# Altium PCB Temp.PcbDoc
Units mm, origin at the board's own origin, x right, y up, seen from the top; angles counter-clockwise.
Board outline 30 x 40 mm, 2 copper layers (Top Layer, Bottom Layer); 5 components, 0 nets, 215 pads, 0 vias.
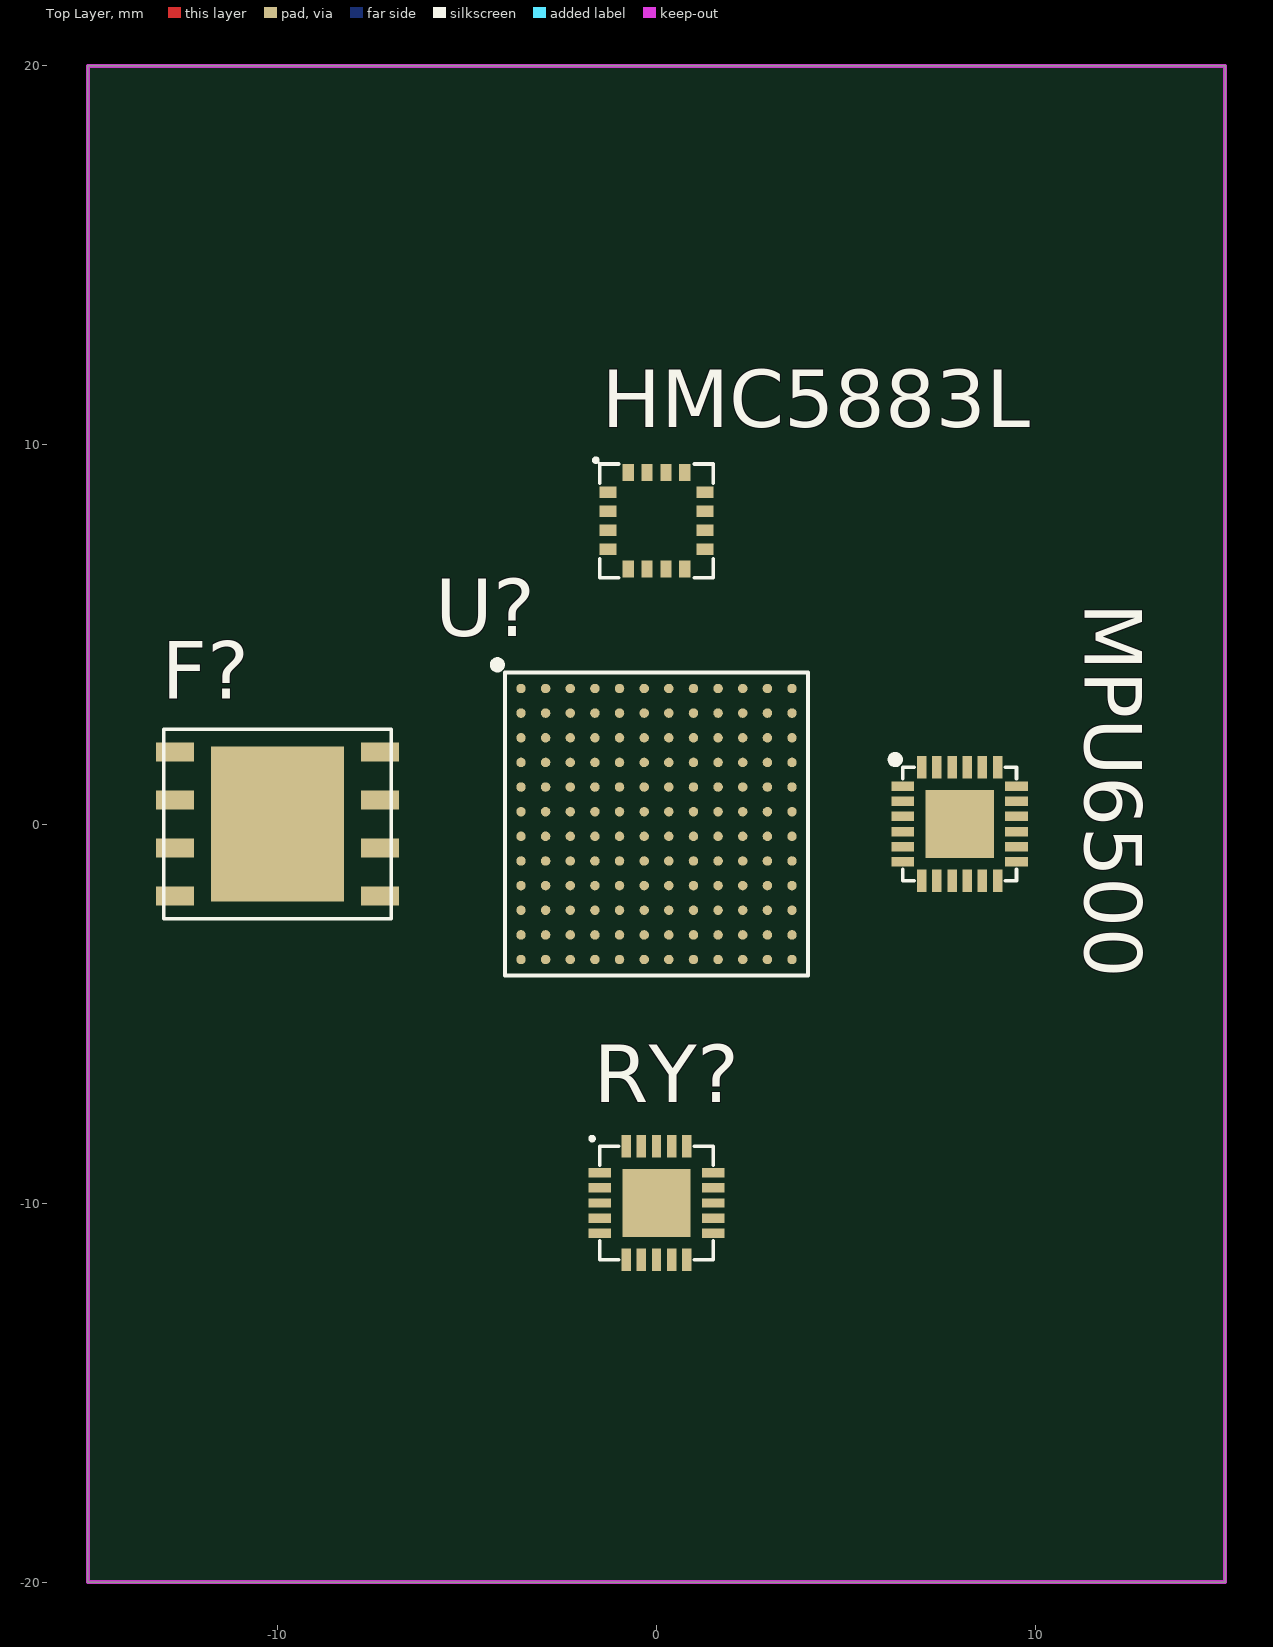
[diagram p0: Top Layer view]
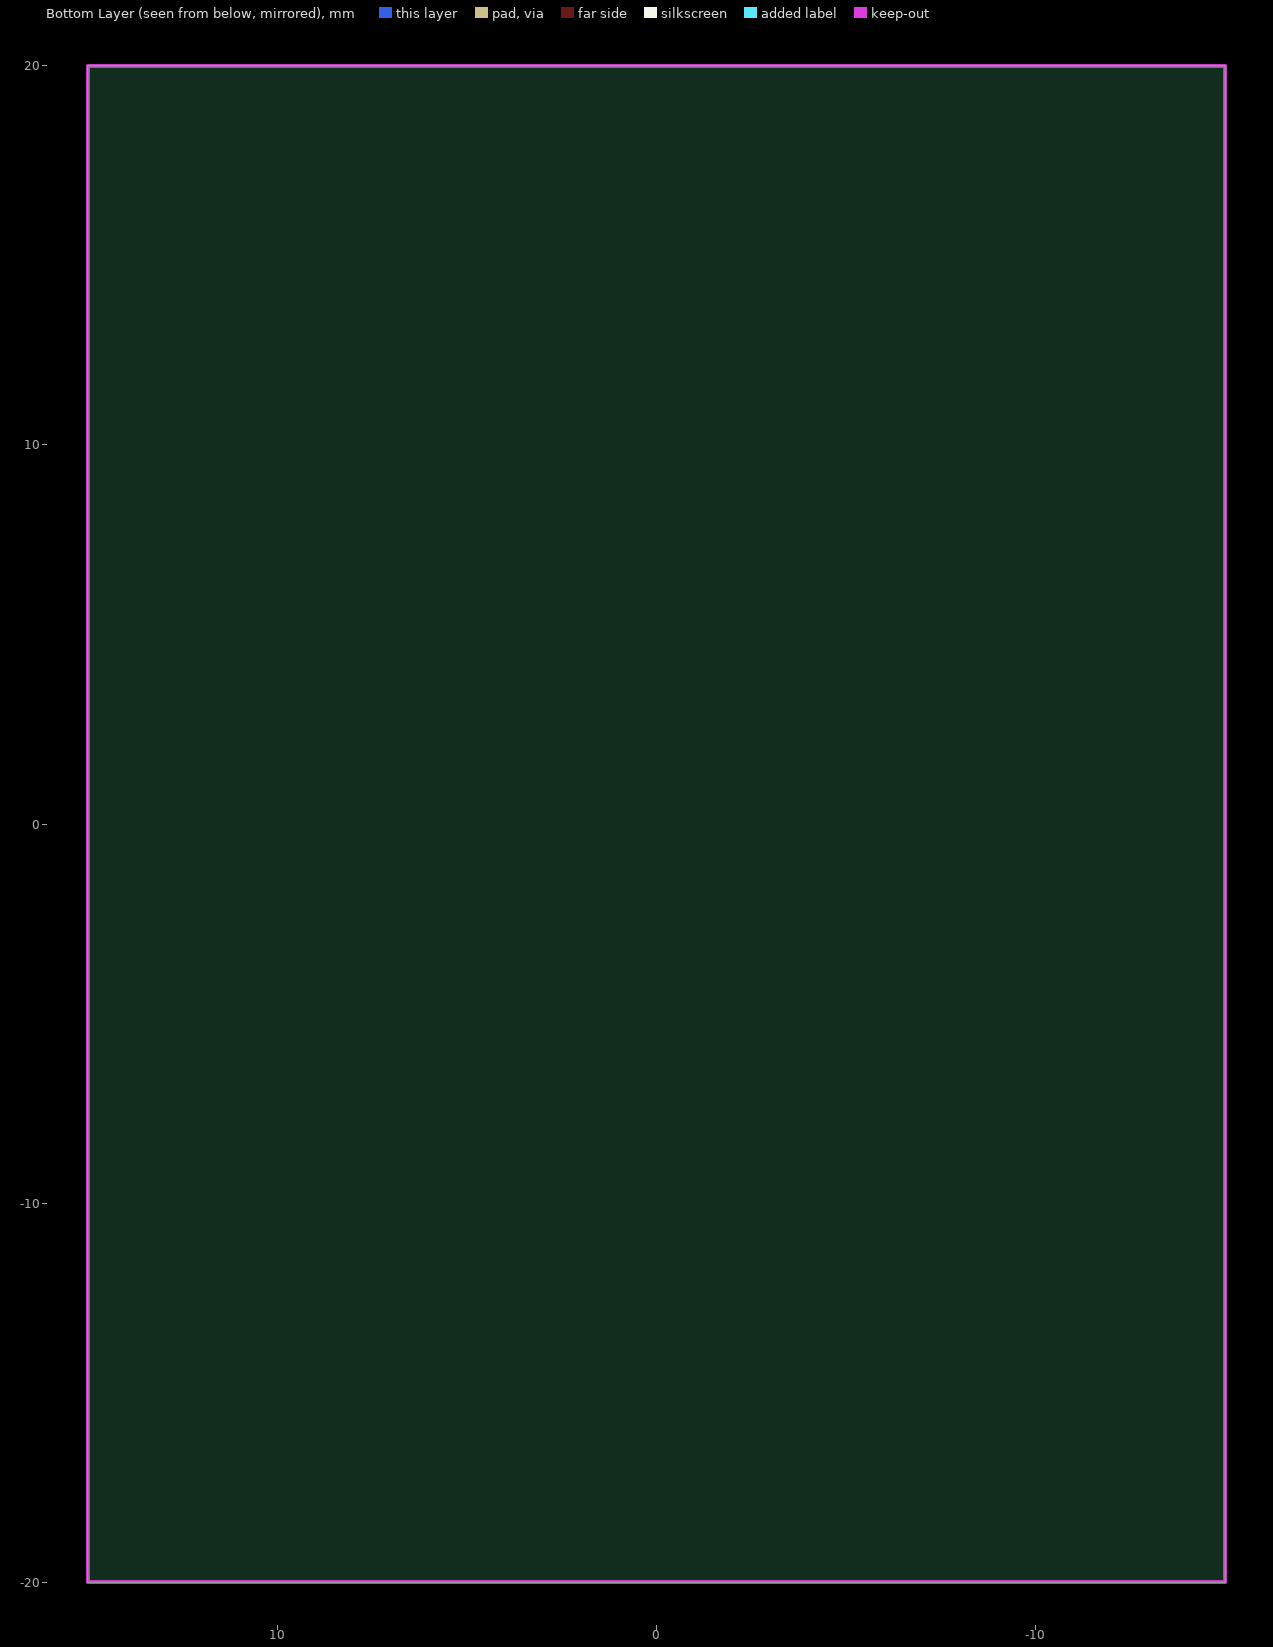
[diagram p1: Bottom Layer view, seen from below]

## Layer stack, top to bottom
Top Solder: solder mask 0.0102, Solder Resist, Dk 3.5
Top Layer: signal copper 0.0356
Dielectric 1: dielectric 0.32, FR-4, Dk 4.8
Bottom Layer: signal copper 0.0356
Bottom Solder: solder mask 0.0102, Solder Resist, Dk 3.5

## Board outline
-15,-20 -15,20 15,20 15,-20

## Design rules (kind name [scope] priority, off if disabled: settings)
Clearance [All] p1: gap=0.254 ignorepadtopadclearanceinfootprint=FALSE except(0: Arc-Hole Track-Hole SMDPad-Hole THPad-Hole Via-Hole Fill-Hole Poly-Hole Region-Hole Text-Hole)
PolygonConnect [All] p1: connectstyle=Relief reliefconductorwidth=0.254 reliefentries=4 polygonreliefangle="90 Angle" airgapwidth=0.254
RoutingVias [All] p1: holewidth=0.711 width=1.27 viastyle="Through Hole" minholewidth=0.711 minwidth=1.27 maxholewidth=0.711 maxwidth=1.27
SolderMaskExpansion [All] p1: expansion=0.102 istentingtop=FALSE
Width [All] p1: maxlimit=0.254 minlimit=0.254 preferedwidth=0.254
30 further rules are at their usual default settings.

## Classes and differential pairs
component class Temp: F? HMC5883L MPU6500 RY?

## Components (designator, comment, footprint, x,y, rotation, side; value= is the part's Value field where it differs from the comment)
F? "GD25LQ128DWIGR" GD25LQ128DWIGR -10,0 r0 top locked
HMC5883L "HMC5883L" HMC5883L 0,8 r0 top locked
MPU6500 "MPU6500" MUP6500 8,0 r0 top locked
RY? "RY1303" RY1303 0,-10 r0 top locked
U? "K210" K210 0,0 r0 top locked

## Footprints (in the part's own frame and the unit in brackets; to place one, negate y for a bottom-side part, rotate by r counter-clockwise, add the part's x,y. Pads: shape width x height; smd on the part's side, far side on the other; paste and mask are expansions set on the pad)
GD25LQ128DWIGR [mm]
  rect 1x0.5 smd: 1(-2.7,1.905) 2(-2.7,0.635) 3(-2.7,-0.635) 4(-2.7,-1.905) 5(2.7,-1.905) 6(2.7,-0.635) 7(2.7,0.635) 8(2.7,1.905)
  rect 3.5x4.1 smd: 4(0,0)
  silkscreen extent -3,-2.5 3,2.5, body extent -3.01,-2.5 3.01,2.5, height 0.81
HMC5883L [mm]
  rect 0.45x0.3 smd: 1(-1.275,0.75) 2(-1.275,0.25) 3(-1.275,-0.25) 4(-1.275,-0.75) 9(1.275,-0.75) 10(1.275,-0.25) 11(1.275,0.25) 12(1.275,0.75)
  rect 0.3x0.45 smd: 5(-0.75,-1.275) 6(-0.25,-1.275) 7(0.25,-1.275) 8(0.75,-1.275) 13(0.75,1.275) 14(0.25,1.275) 15(-0.25,1.275) 16(-0.75,1.275)
  silkscreen extent -1.65,-1.5 1.5,1.65, body extent -1.5,-1.5 1.5,1.5, height 0.91
K210 [mm]
  round 0.25 smd: A1(-3.575,3.575) A2(-2.925,3.575) A3(-2.275,3.575) A4(-1.625,3.575) A5(-0.975,3.575) A6(-0.325,3.575) A7(0.325,3.575) A8(0.975,3.575) A9(1.625,3.575) A10(2.275,3.575) A11(2.925,3.575) A12(3.575,3.575) B1(-3.575,2.925) B2(-2.925,2.925) B3(-2.275,2.925) B4(-1.625,2.925) B5(-0.975,2.925) B6(-0.325,2.925) B7(0.325,2.925) B8(0.975,2.925) B9(1.625,2.925) B10(2.275,2.925) B11(2.925,2.925) B12(3.575,2.925) C1(-3.575,2.275) C2(-2.925,2.275) C3(-2.275,2.275) C4(-1.625,2.275) C5(-0.975,2.275) C6(-0.325,2.275) C7(0.325,2.275) C8(0.975,2.275) C9(1.625,2.275) C10(2.275,2.275) C11(2.925,2.275) C12(3.575,2.275) D1(-3.575,1.625) D2(-2.925,1.625) D3(-2.275,1.625) D4(-1.625,1.625) D5(-0.975,1.625) D6(-0.325,1.625) D7(0.325,1.625) D8(0.975,1.625) D9(1.625,1.625) D10(2.275,1.625) D11(2.925,1.625) D12(3.575,1.625) E1(-3.575,0.975) E2(-2.925,0.975) E3(-2.275,0.975) E4(-1.625,0.975) E5(-0.975,0.975) E6(-0.325,0.975) E7(0.325,0.975) E8(0.975,0.975) E9(1.625,0.975) E10(2.275,0.975) E11(2.925,0.975) E12(3.575,0.975) F1(-3.575,0.325) F2(-2.925,0.325) F3(-2.275,0.325) F4(-1.625,0.325) F5(-0.975,0.325) F6(-0.325,0.325) F7(0.325,0.325) F8(0.975,0.325) F9(1.625,0.325) F10(2.275,0.325) F11(2.925,0.325) F12(3.575,0.325) G1(-3.575,-0.325) G2(-2.925,-0.325) G3(-2.275,-0.325) G4(-1.625,-0.325) G5(-0.975,-0.325) G6(-0.325,-0.325) G7(0.325,-0.325) G8(0.975,-0.325) G9(1.625,-0.325) G10(2.275,-0.325) G11(2.925,-0.325) G12(3.575,-0.325) H1(-3.575,-0.975) H2(-2.925,-0.975) H3(-2.275,-0.975) H4(-1.625,-0.975) H5(-0.975,-0.975) H6(-0.325,-0.975) H7(0.325,-0.975) H8(0.975,-0.975) H9(1.625,-0.975) H10(2.275,-0.975) H11(2.925,-0.975) H12(3.575,-0.975) J1(-3.575,-1.625) J2(-2.925,-1.625) J3(-2.275,-1.625) J4(-1.625,-1.625) J5(-0.975,-1.625) J6(-0.325,-1.625) J7(0.325,-1.625) J8(0.975,-1.625) J9(1.625,-1.625) J10(2.275,-1.625) J11(2.925,-1.625) J12(3.575,-1.625) K1(-3.575,-2.275) K2(-2.925,-2.275) K3(-2.275,-2.275) K4(-1.625,-2.275) K5(-0.975,-2.275) K6(-0.325,-2.275) K7(0.325,-2.275) K8(0.975,-2.275) K9(1.625,-2.275) K10(2.275,-2.275) K11(2.925,-2.275) K12(3.575,-2.275) L1(-3.575,-2.925) L2(-2.925,-2.925) L3(-2.275,-2.925) L4(-1.625,-2.925) L5(-0.975,-2.925) L6(-0.325,-2.925) L7(0.325,-2.925) L8(0.975,-2.925) L9(1.625,-2.925) L10(2.275,-2.925) L11(2.925,-2.925) L12(3.575,-2.925) M1(-3.575,-3.575) M2(-2.925,-3.575) M3(-2.275,-3.575) M4(-1.625,-3.575) M5(-0.975,-3.575) M6(-0.325,-3.575) M7(0.325,-3.575) M8(0.975,-3.575) M9(1.625,-3.575) M10(2.275,-3.575) M11(2.925,-3.575) M12(3.575,-3.575)
  silkscreen extent -4.3,-4 4,4.3, body extent -4,-4 4,4, height 1.15
MUP6500 [mm]
  rect 0.6x0.25 smd: 1(-1.5,1) 2(-1.5,0.6) 3(-1.5,0.2) 4(-1.5,-0.2) 5(-1.5,-0.6) 6(-1.5,-1) 13(1.5,-1) 14(1.5,-0.6) 15(1.5,-0.2) 16(1.5,0.2) 17(1.5,0.6) 18(1.5,1)
  rect 0.25x0.6 smd: 7(-1,-1.5) 8(-0.6,-1.5) 9(-0.2,-1.5) 10(0.2,-1.5) 11(0.6,-1.5) 12(1,-1.5) 19(1,1.5) 20(0.6,1.5) 21(0.2,1.5) 22(-0.2,1.5) 23(-0.6,1.5) 24(-1,1.5)
  rect 1.8x1.8 smd: 18(0,0)
  silkscreen extent -1.8,-1.5 1.5,1.8, body extent -1.51,-1.51 1.51,1.51, height 0.96
RY1303 [mm]
  rect 0.6x0.25 smd: 1(-1.5,0.8) 2(-1.5,0.4) 3(-1.5,0) 4(-1.5,-0.4) 5(-1.5,-0.8) 11(1.5,-0.8) 12(1.5,-0.4) 13(1.5,0) 14(1.5,0.4) 15(1.5,0.8)
  rect 0.25x0.6 smd: 6(-0.8,-1.5) 7(-0.4,-1.5) 8(0,-1.5) 9(0.4,-1.5) 10(0.8,-1.5) 16(0.8,1.5) 17(0.4,1.5) 18(0,1.5) 19(-0.4,1.5) 20(-0.8,1.5)
  rect 1.8x1.8 smd: 21(0,0)
  silkscreen extent -1.75,-1.5 1.5,1.75, body extent -1.51,-1.51 1.51,1.51, height 0.81

## Part data
F?: "SPI-FLASH"
HMC5883L: "3-Axis Digital Compass"
RY?: "3 channel buck converter"
U?: "Kendryte210-MCU"

## Nets (pads, with @x,y where several pads share a name; then routed paths per layer and width w, separated by ;. In a path a pad name is that pad's centre, name@x,y a point inside that pad or via, vN(x,y) a via of type N, cw(c..) or ccw(c..) an arc to the next point about the centre after c; other vN are vias at no path point)
pads on no net: F?.1 F?.2 F?.3 F?.4 F?.5 F?.6 F?.7 F?.8 HMC5883L.1 HMC5883L.2 HMC5883L.3 HMC5883L.4 HMC5883L.5 HMC5883L.6 HMC5883L.7 HMC5883L.8 HMC5883L.9 HMC5883L.10 HMC5883L.11 HMC5883L.12 HMC5883L.13 HMC5883L.14 HMC5883L.15 HMC5883L.16 MPU6500.1 MPU6500.2 MPU6500.3 MPU6500.4 MPU6500.5 MPU6500.6 MPU6500.7 MPU6500.8 MPU6500.9 MPU6500.10 MPU6500.11 MPU6500.12 MPU6500.13 MPU6500.14 MPU6500.15 MPU6500.16 MPU6500.17 MPU6500.18 MPU6500.19 MPU6500.20 MPU6500.21 MPU6500.22 MPU6500.23 MPU6500.24 RY?.1 RY?.2 RY?.3 RY?.4 RY?.5 RY?.6 RY?.7 RY?.8 RY?.9 RY?.10 RY?.11 RY?.12 RY?.13 RY?.14 RY?.15 RY?.16 RY?.17 RY?.18 RY?.19 RY?.20 RY?.21 U?.A1 U?.A2 U?.A3 U?.A4 U?.A5 U?.A6 U?.A7 U?.A8 U?.A9 U?.A10 U?.A11 U?.A12 U?.B1 U?.B2 U?.B3 U?.B4 U?.B5 U?.B6 U?.B7 U?.B8 U?.B9 U?.B10 U?.B11 U?.B12 U?.C1 U?.C2 U?.C3 U?.C4 U?.C5 U?.C6 U?.C7 U?.C8 U?.C9 U?.C10 U?.C11 U?.C12 U?.D1 U?.D2 U?.D3 U?.D4 U?.D5 U?.D6 U?.D7 U?.D8 U?.D9 U?.D10 U?.D11 U?.D12 U?.E1 U?.E2 U?.E3 U?.E4 U?.E5 U?.E6 U?.E7 U?.E8 U?.E9 U?.E10 U?.E11 U?.E12 U?.F1 U?.F2 U?.F3 U?.F4 U?.F5 U?.F6 U?.F7 U?.F8 U?.F9 U?.F10 U?.F11 U?.F12 U?.G1 U?.G2 U?.G3 U?.G4 U?.G5 U?.G6 U?.G7 U?.G8 U?.G9 U?.G10 U?.G11 U?.G12 U?.H1 U?.H2 U?.H3 U?.H4 U?.H5 U?.H6 U?.H7 U?.H8 U?.H9 U?.H10 U?.H11 U?.H12 U?.J1 U?.J2 U?.J3 U?.J4 U?.J5 U?.J6 U?.J7 U?.J8 U?.J9 U?.J10 U?.J11 U?.J12 U?.K1 U?.K2 U?.K3 U?.K4 U?.K5 U?.K6 U?.K7 U?.K8 U?.K9 U?.K10 U?.K11 U?.K12 U?.L1 U?.L2 U?.L3 U?.L4 U?.L5 U?.L6 U?.L7 U?.L8 U?.L9 U?.L10 U?.L11 U?.L12 U?.M1 U?.M2 U?.M3 U?.M4 U?.M5 U?.M6 U?.M7 U?.M8 U?.M9 U?.M10 U?.M11 U?.M12

## Keep-outs
Keep-Out Layer:
  the board outline again, w0.1